# EAGLE board atariboard (EAGLE 7.2.0)
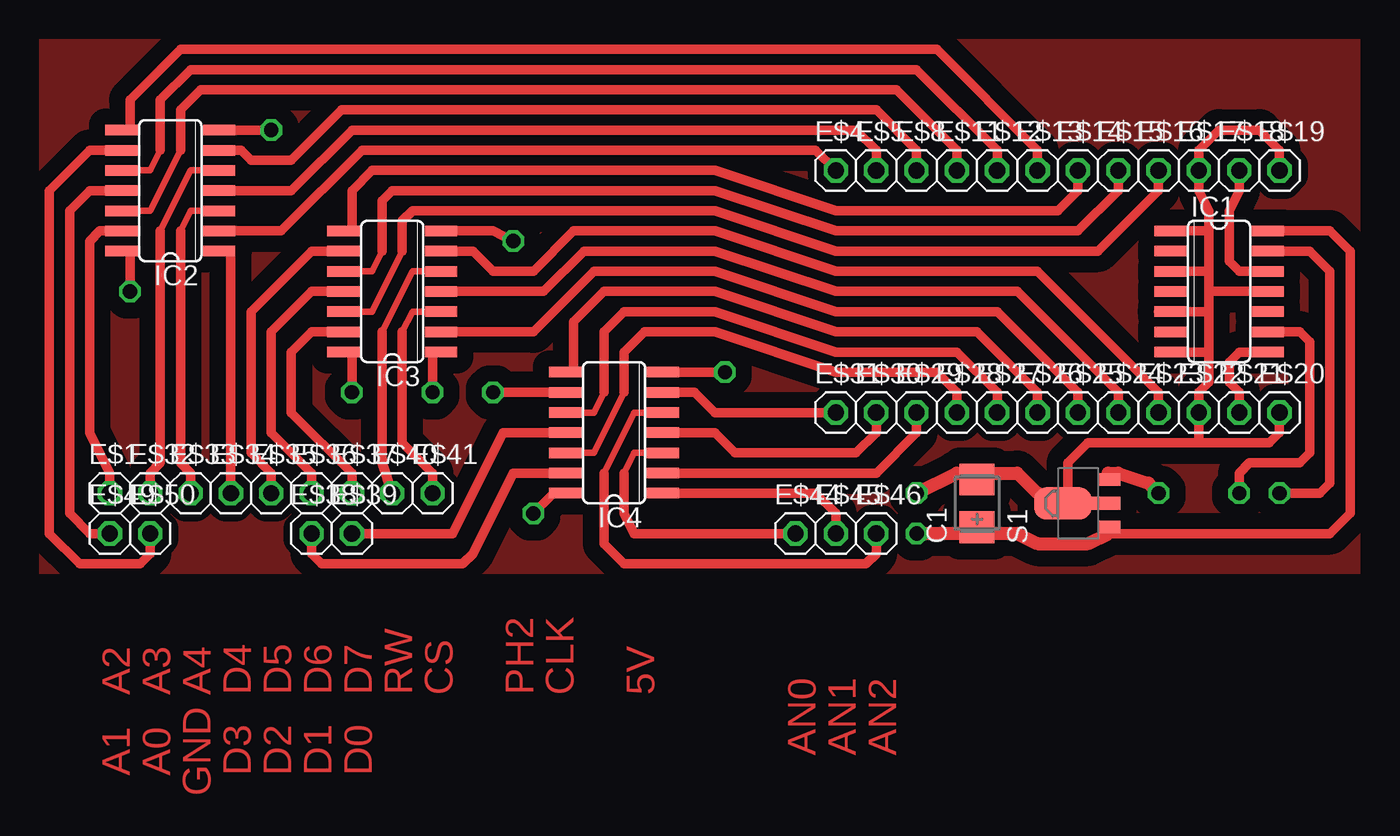
[diagram p0: board, top side]
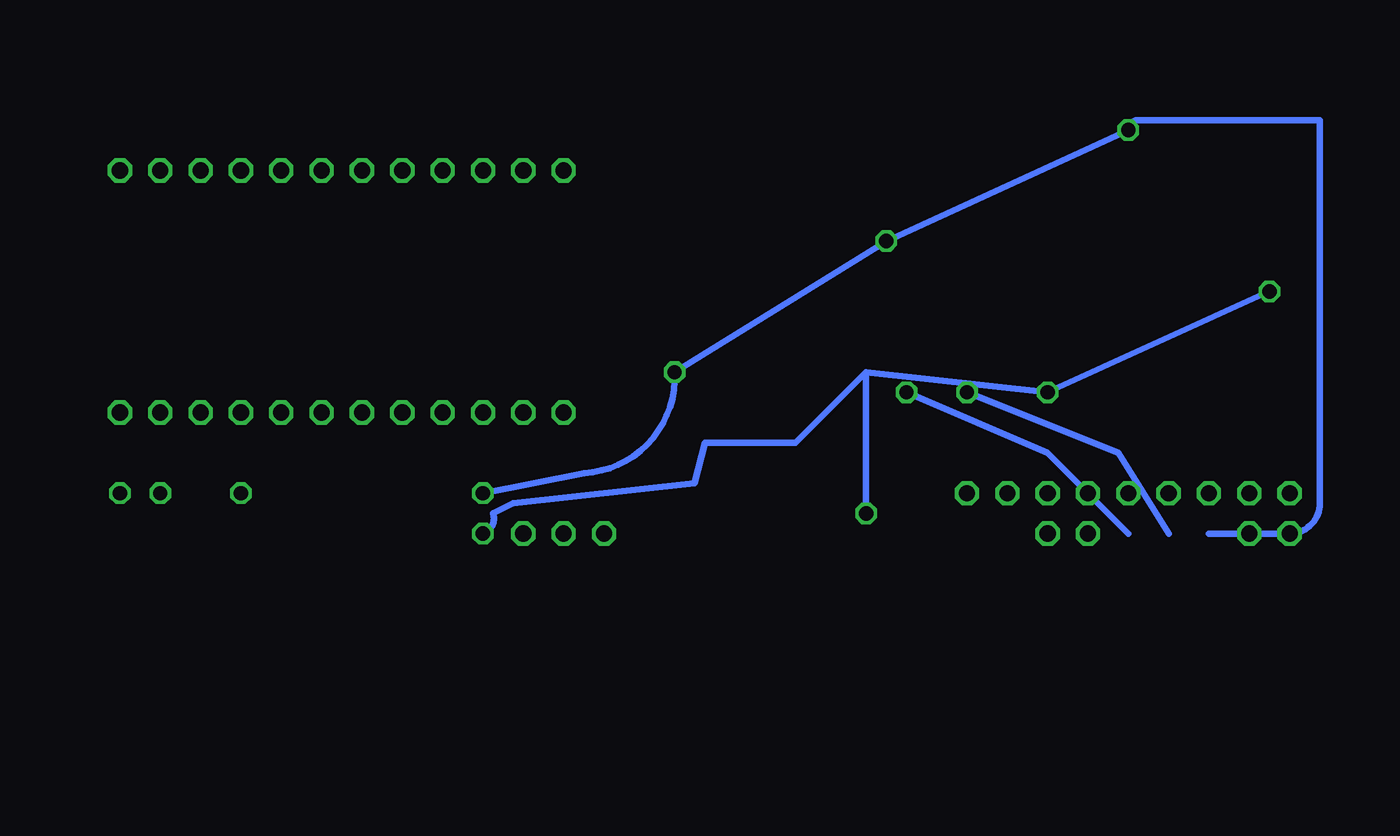
[diagram p1: board, bottom side, seen from below]

No outline drawn. Coordinates in mm, seen from the top.
Copper layers (1*16): Top 0.035mm / dielectric 1.5mm / Bottom 0.035mm
Design rules "default": minimum track width 10mil, minimum drill 24mil, track to track 8mil, track to pad 8mil, pad to pad 8mil, via to via 8mil, smd to smd 8mil, copper to edge 40mil, drill to drill 8mil, minimum pad ring 10mil, minimum via ring 8mil, stop-mask expansion 4mil, vias tented up to drill 0mil, thermal gap 10mil

## Footprints (pad centres in the part's own frame; a part is rotated, then mirrored left to right if it is on the bottom)
CT3528 = smd 2 x 2.2: + -1.5,0; - 1.5,0
1X01 = drill 1.016 octagon: 1 0,0
SO14 = smd 0.66 x 2.032: 1 -3.81,-3.073; 2 -2.54,-3.073; 3 -1.27,-3.073; 4 0,-3.073; 5 1.27,-3.073; 6 2.54,-3.073; 7 3.81,-3.073; 8 3.81,3.073; 9 2.54,3.073; 10 1.27,3.073; 11 0,3.073; 12 -1.27,3.073; 13 -2.54,3.073; 14 -3.81,3.073
SOT89 = smd 0.8 x 1.4: 1 -1.499,-1.981; 3 1.499,-1.981 | smd 0.8 x 1.9: 2 0,-1.727 | smd 2.032 x 3.65: 2@1 0,0.94

## Placement (x,y rotation side)
C1  [CT3528]  60.96,5.71 90 top
E$1  [1X01]  6.35,6.35 0 top
E$4  [1X01]  52.07,26.67 0 top
E$5  [1X01]  54.61,26.67 0 top
E$8  [1X01]  57.15,26.67 0 top
E$11  [1X01]  59.69,26.67 0 top
E$12  [1X01]  62.23,26.67 0 top
E$13  [1X01]  64.77,26.67 0 top
E$14  [1X01]  67.31,26.67 0 top
E$15  [1X01]  69.85,26.67 0 top
E$16  [1X01]  72.39,26.67 0 top
E$17  [1X01]  74.93,26.67 0 top
E$18  [1X01]  77.47,26.67 0 top
E$19  [1X01]  80.01,26.67 0 top
E$20  [1X01]  80.01,11.43 0 top
E$21  [1X01]  77.47,11.43 0 top
E$22  [1X01]  74.93,11.43 0 top
E$23  [1X01]  72.39,11.43 0 top
E$24  [1X01]  69.85,11.43 0 top
E$25  [1X01]  67.31,11.43 0 top
E$26  [1X01]  64.77,11.43 0 top
E$27  [1X01]  62.23,11.43 0 top
E$28  [1X01]  59.69,11.43 0 top
E$29  [1X01]  57.15,11.43 0 top
E$30  [1X01]  54.61,11.43 0 top
E$31  [1X01]  52.07,11.43 0 top
E$32  [1X01]  8.89,6.35 0 top
E$33  [1X01]  11.43,6.35 0 top
E$34  [1X01]  13.97,6.35 0 top
E$35  [1X01]  16.51,6.35 0 top
E$36  [1X01]  19.05,6.35 0 top
E$37  [1X01]  21.59,6.35 0 top
E$38  [1X01]  19.05,3.81 0 top
E$39  [1X01]  21.59,3.81 0 top
E$40  [1X01]  24.13,6.35 0 top
E$41  [1X01]  26.67,6.35 0 top
E$44  [1X01]  49.53,3.81 0 top
E$45  [1X01]  52.07,3.81 0 top
E$46  [1X01]  54.61,3.81 0 top
E$49  [1X01]  6.35,3.81 0 top
E$50  [1X01]  8.89,3.81 0 top
IC1  [SO14]  76.2,19.05 270 top
IC2  [SO14]  10.16,25.4 90 top
IC3  [SO14]  24.13,19.05 90 top
IC4  [SO14]  38.1,10.16 90 top
S1  [SOT89]  67.31,5.71 90 top

## Library data of the parts
C1 = ref-packages-longpad
E$1 E$4 E$5 E$8 E$11-E$41 E$44-E$46 E$49 E$50 = pinhead
IC1-IC4 = 74xx-us
S1 = zetex

## Nets
IC1: E$18.1
S$1: E$50.1
S$5: E$49.1
S$7: E$1.1
S$14: E$14.1
S$16: E$15.1
S$17: E$16.1
S$18: E$23.1
S$19: E$24.1
S$20: E$31.1
S$21: E$38.1
S$23: E$28.1
S$24: E$27.1
S$25: E$26.1
S$26: E$25.1
S$27: E$29.1
S$29: E$45.1
S$30: E$34.1
S$31: E$44.1
S$32: E$35.1
S$33: E$37.1
S$34: E$30.1
S$35: E$40.1
S$36: E$39.1
S$37: E$41.1
S$40: E$46.1
S$42: E$21.1
S$43: E$17.1 E$19.1 E$20.1 E$22.1

## Tracks (layer width: path | path; a pad name or v marks a point on that pad's centre or on a via)
IC1
  Top 0.61: 78.74,20.32 77.47,20.32 76.83,20.95 76.83,24.13 77.47,25.4 E$18.1
S$1
  Top 0.61: 6.35,27.94 5.08,27.94 2.54,25.4 2.54,3.81 4.45,1.91 8.26,1.91 8.89,2.54 E$50.1
S$2
  Top 0.61: 57.15,26.67 57.15,27.94 54.61,30.48 20.95,30.48 17.78,27.3 15.24,27.3 14.61,27.94 13.97,27.94
S$3  (via drill 0.9)
  Top 0.61: v16.51,29.21 13.97,29.21 | 27.94,22.86 30.48,22.86 v31.75,22.23 | 41.91,13.97 v45.09,13.97
  Top 0.813: v57.15,6.35 59.69,7.62 63.5,7.62 64.77,6.35
  Bottom 0.406: 11.43,3.81 6.35,3.81 arc-90 4.45,5.71 4.45,29.84 15.88,29.84 arc-90 v16.51,29.21 v31.75,22.23 v45.09,13.97 arc90 50.8,7.62 v57.15,6.35
S$4
  Top 0.61: 64.77,26.67 64.77,27.94 58.42,34.29 10.79,34.29 7.62,31.11 7.62,29.21
S$5
  Top 0.61: 6.35,25.4 5.08,25.4 3.81,24.13 3.81,5.08 5.08,3.81 E$49.1
S$6
  pour Top (isolate 1.016): 1.91,34.92 85.09,34.92 85.09,1.27 1.91,1.27
S$7
  Top 0.61: 6.35,22.86 5.71,22.86 5.08,22.23 5.08,10.16 6.35,7.62 E$1.1
S$8  (via drill 0.9)
  Top 0.61: 7.62,21.59 v7.62,19.05 | 21.59,15.24 v21.59,12.7 | v33.02,5.08 34.29,6.35 | 80.01,22.86 83.19,22.86 84.45,21.59 84.45,5.08 83.19,3.81 69.22,3.81
  Top 0.813: v57.15,3.81 63.5,3.81 64.77,3.17 67.94,3.17 69.22,3.81
  Bottom 0.406: v7.62,19.05 v21.59,12.7 33.02,13.97 | 33.02,13.97 v33.02,5.08 | v57.15,3.81 arc-90 56.52,5.08 55.24,5.71 43.81,6.99 43.18,9.53 37.47,9.53 33.02,13.97
S$9
  Top 0.406: 6.35,26.67 8.89,26.67 9.53,27.94
  Top 0.61: 62.23,26.67 62.23,27.94 57.15,33.02 11.43,33.02 9.53,31.11 9.53,27.94
S$10
  Top 0.61: 19.05,6.35 19.05,7.62 16.51,10.16 16.51,16.51 19.05,19.05 20.32,19.05
S$11  (via drill 0.9)
  Top 0.61: v80.01,6.35 82.55,6.35 83.19,6.99 83.19,20.32 81.92,21.59 78.74,21.59
S$12
  Top 0.406: 13.97,24.13 11.43,24.13 10.79,22.86
  Top 0.61: 11.43,6.35 11.43,7.62 10.79,8.26 10.79,22.86
S$13
  Top 0.61: 13.97,25.4 17.78,25.4 21.59,29.21 53.34,29.21 54.61,27.94 54.61,26.67
S$14
  Top 0.61: 21.59,22.86 21.59,25.4 22.86,26.67 44.45,26.67 52.07,24.13 66.04,24.13 67.31,25.4 E$14.1
S$15
  Top 0.61: 52.07,26.67 50.8,27.94 22.23,27.94 17.14,22.86 13.97,22.86
S$16
  Top 0.406: 23.5,21.59 22.86,20.32 20.32,20.32
  Top 0.61: 23.5,21.59 23.5,24.77 24.13,25.4 44.45,25.4 52.07,22.86 67.31,22.86 69.85,25.4 E$15.1
S$17
  Top 0.406: 24.77,21.59 22.86,17.78 20.32,17.78
  Top 0.61: 24.77,21.59 24.77,23.5 25.4,24.13 44.45,24.13 52.07,21.59 68.58,21.59 72.39,25.4 E$16.1
S$18
  Top 0.61: 27.94,21.59 29.21,21.59 30.48,20.32 33.02,20.32 35.56,22.86 44.45,22.86 52.07,20.32 64.77,20.32 72.39,12.7 E$23.1
S$19
  Top 0.61: E$24.1 69.85,12.7 63.5,19.05 52.07,19.05 44.45,21.59 36.2,21.59 33.66,19.05 27.94,19.05
S$20
  Top 0.61: E$31.1 44.45,11.43 43.18,12.7 41.91,12.7
S$21
  Top 0.61: E$38.1 19.05,2.54 19.68,1.91 28.57,1.91 29.21,2.54 31.75,7.62 34.29,7.62
S$22
  Top 0.406: 10.79,27.94 8.89,24.13 6.35,24.13
  Top 0.61: 59.69,26.67 59.69,27.94 55.88,31.75 12.06,31.75 10.79,30.48 10.79,27.94
S$23
  Top 0.406: 38.73,12.7 36.83,8.89 34.29,8.89
  Top 0.61: E$28.1 59.69,12.7 58.42,13.97 52.07,13.97 44.45,16.51 40.01,16.51 38.73,15.24 38.73,12.7
S$24
  Top 0.406: 37.47,12.7 36.83,11.43 34.29,11.43
  Top 0.61: E$27.1 62.23,12.7 59.69,15.24 52.07,15.24 44.45,17.78 38.73,17.78 37.47,16.51 37.47,12.7
S$25
  Top 0.61: E$26.1 64.77,12.7 60.96,16.51 52.07,16.51 44.45,19.05 37.47,19.05 35.56,17.14 35.56,13.97
S$26
  Top 0.61: 27.94,16.51 33.02,16.51 36.83,20.32 44.45,20.32 52.07,17.78 62.23,17.78 67.31,12.7 E$25.1
S$27
  Top 0.61: E$29.1 57.15,10.16 54.61,7.62 41.91,7.62
S$28
  Top 0.406: 13.97,26.67 11.43,26.67 9.53,22.86
  Top 0.61: 9.53,22.86 9.53,8.26 8.89,7.62 8.89,6.35
S$29
  Top 0.61: E$45.1 52.07,5.08 50.8,6.35 40.64,6.35
S$30
  Top 0.61: E$34.1 13.97,21.59
S$31
  Top 0.406: 40.64,8.89 39.37,8.89 38.73,7.62
  Top 0.61: E$44.1 39.37,3.81 38.73,5.08 38.73,7.62
S$32
  Top 0.61: E$35.1 16.51,7.62 15.24,8.89 15.24,17.78 19.05,21.59 20.32,21.59
S$33
  Top 0.61: 20.32,16.51 19.05,16.51 17.78,15.24 17.78,11.43 21.59,7.62 E$37.1
S$34
  Top 0.61: E$30.1 54.61,10.16 53.34,8.89 45.72,8.89 44.45,10.16 41.91,10.16
S$35
  Top 0.406: 23.5,16.51 25.4,20.32 26.67,20.32
  Top 0.61: E$40.1 23.5,8.26 23.5,16.51
S$36
  Top 0.61: E$39.1 27.94,3.81 31.11,10.16 34.29,10.16
S$37
  Top 0.406: 26.67,17.78 25.4,17.78 24.77,16.51
  Top 0.61: E$41.1 26.67,7.62 24.77,9.53 24.77,16.51
S$38  (via drill 0.9)
  Top 0.61: v26.67,12.7 26.67,15.24
  Bottom 0.406: 13.97,3.81 17.14,8.89 v26.67,12.7
S$39  (via drill 0.9)
  Top 0.61: v30.48,12.7 34.29,12.7
  Bottom 0.406: 16.51,3.81 21.59,8.89 v30.48,12.7
S$40
  Top 0.406: 37.47,7.62 39.37,11.43 40.64,11.43
  Top 0.61: E$46.1 54.61,2.54 53.98,1.91 38.73,1.91 37.47,3.17 37.47,7.62
S$41  (via drill 0.9)
  Top 0.813: 69.22,7.62 69.85,7.62 71.75,6.99 v72.39,6.35
S$42
  Top 0.61: 78.74,15.24 77.47,15.24 76.83,14.61 76.83,13.34 77.47,12.7 E$21.1
S$43
  Top 0.61: 66.67,5.71 66.67,8.26 67.94,9.53 74.93,9.53 | 74.93,9.53 E$22.1 74.93,12.7 75.56,13.34 75.56,15.24 | 75.56,15.24 73.66,15.24 | 75.56,15.24 75.56,17.78 | 75.56,17.78 75.56,19.05 | 75.56,19.05 75.56,20.32 | 75.56,20.32 75.56,22.86 | 75.56,22.86 75.56,24.13 74.93,25.4 E$17.1 74.93,27.94 76.2,29.21 78.74,29.21 80.01,27.94 E$19.1 | 74.93,9.53 79.38,9.53 80.01,10.16 E$20.1 | 75.56,22.86 73.03,22.86 | 75.56,20.32 73.03,20.32 | 75.56,17.78 72.39,17.78 | 75.56,19.05 78.74,19.05
S$45  (via drill 0.9)
  Top 0.61: v77.47,6.35 77.47,7.62 78.11,8.26 81.28,8.26 81.92,8.89 81.92,15.88 81.28,16.51 79.38,16.51

## Text on the board
Top: A2 | A3 | A4 | D4 | D5 | D6 | D7 | RW | CS | PH2 | CLK | 5V | AN0 | AN1 | AN2 | A1 | A0 | D3 | D2 | D1 | D0 | GND